# Altium PCB FTDI_Dynamixel_Board_2025.PcbDoc
Units mil, origin at the board's own origin, x right, y up, seen from the top; angles counter-clockwise.
Board outline 1535.43 x 1417.32 mil, 2 copper layers (Top Layer, Bottom Layer); 11 components, 8 nets, 61 pads, 39 vias.
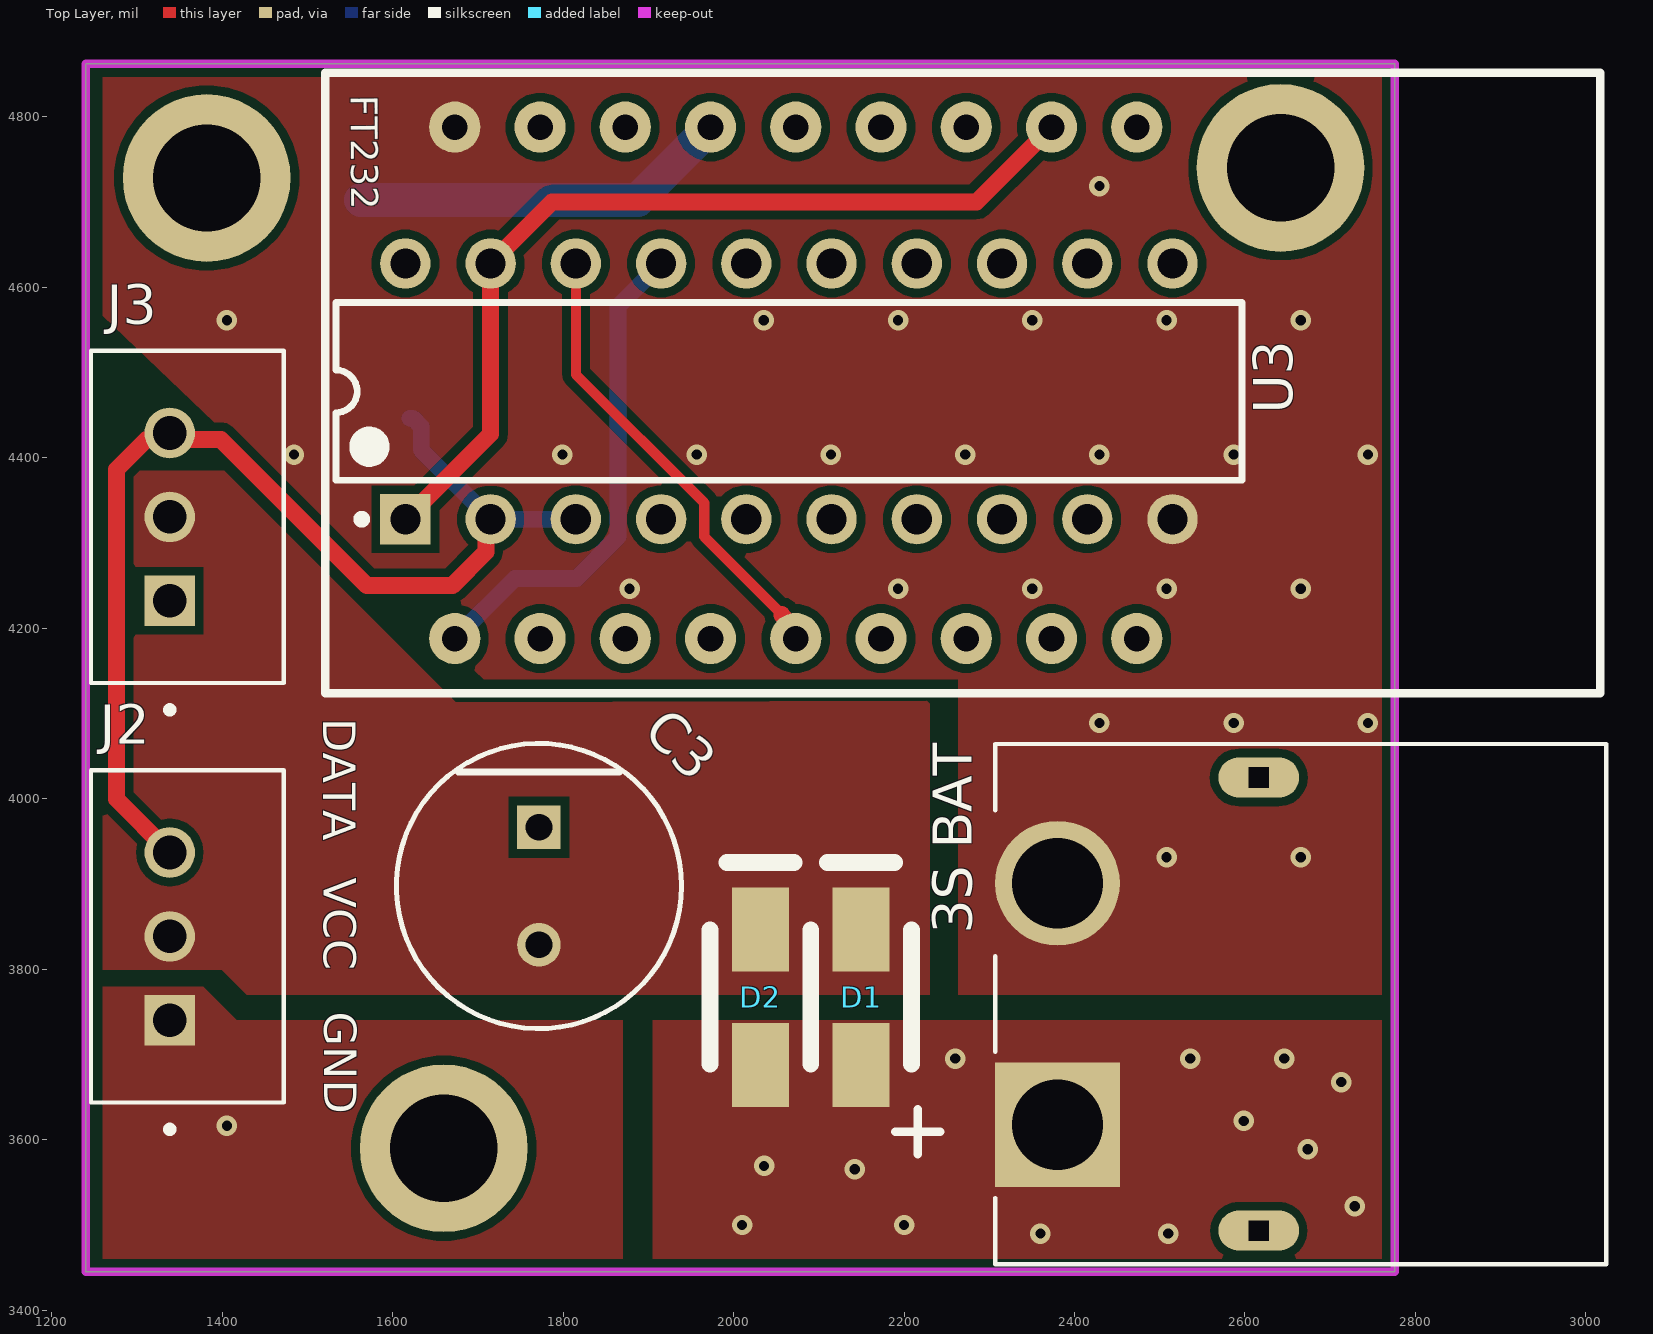
[diagram p0: Top Layer view]
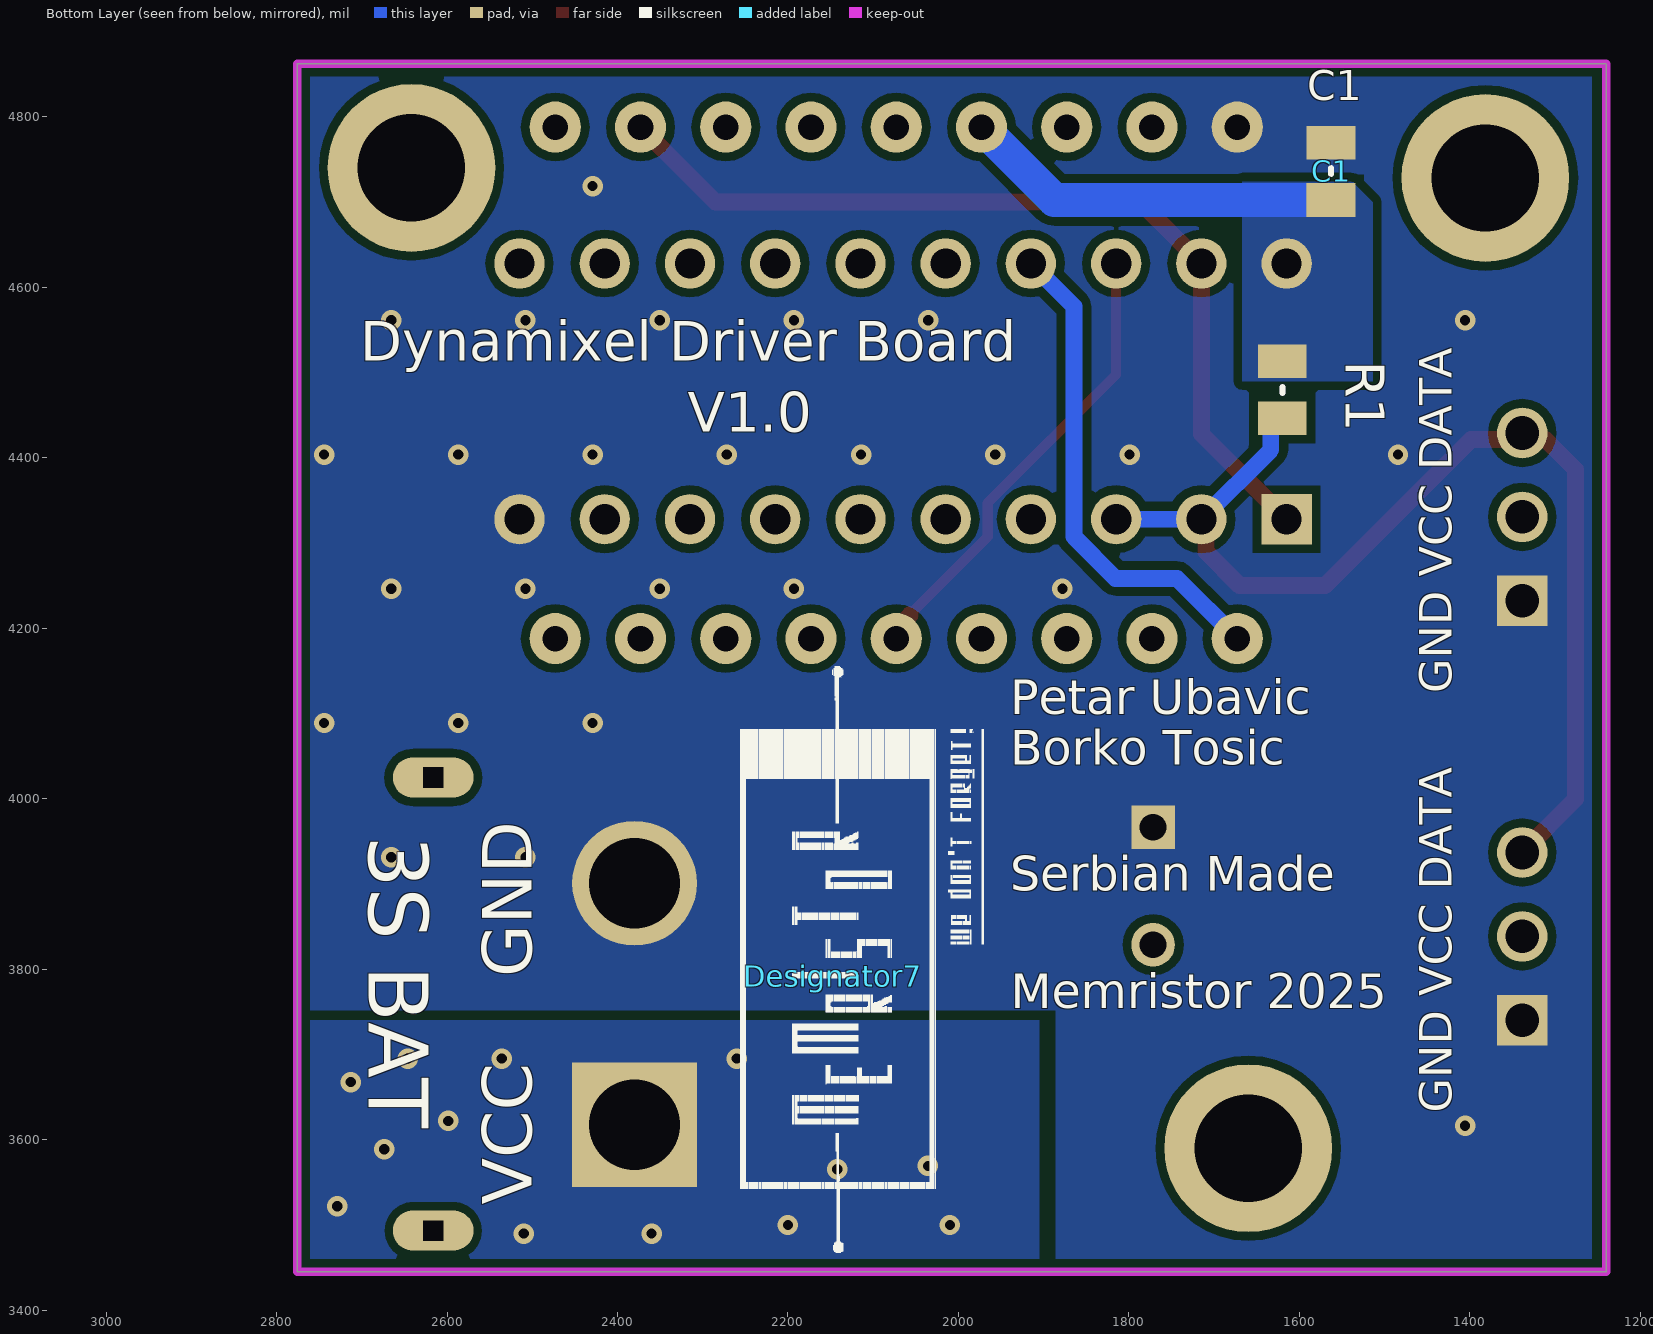
[diagram p1: Bottom Layer view, seen from below]
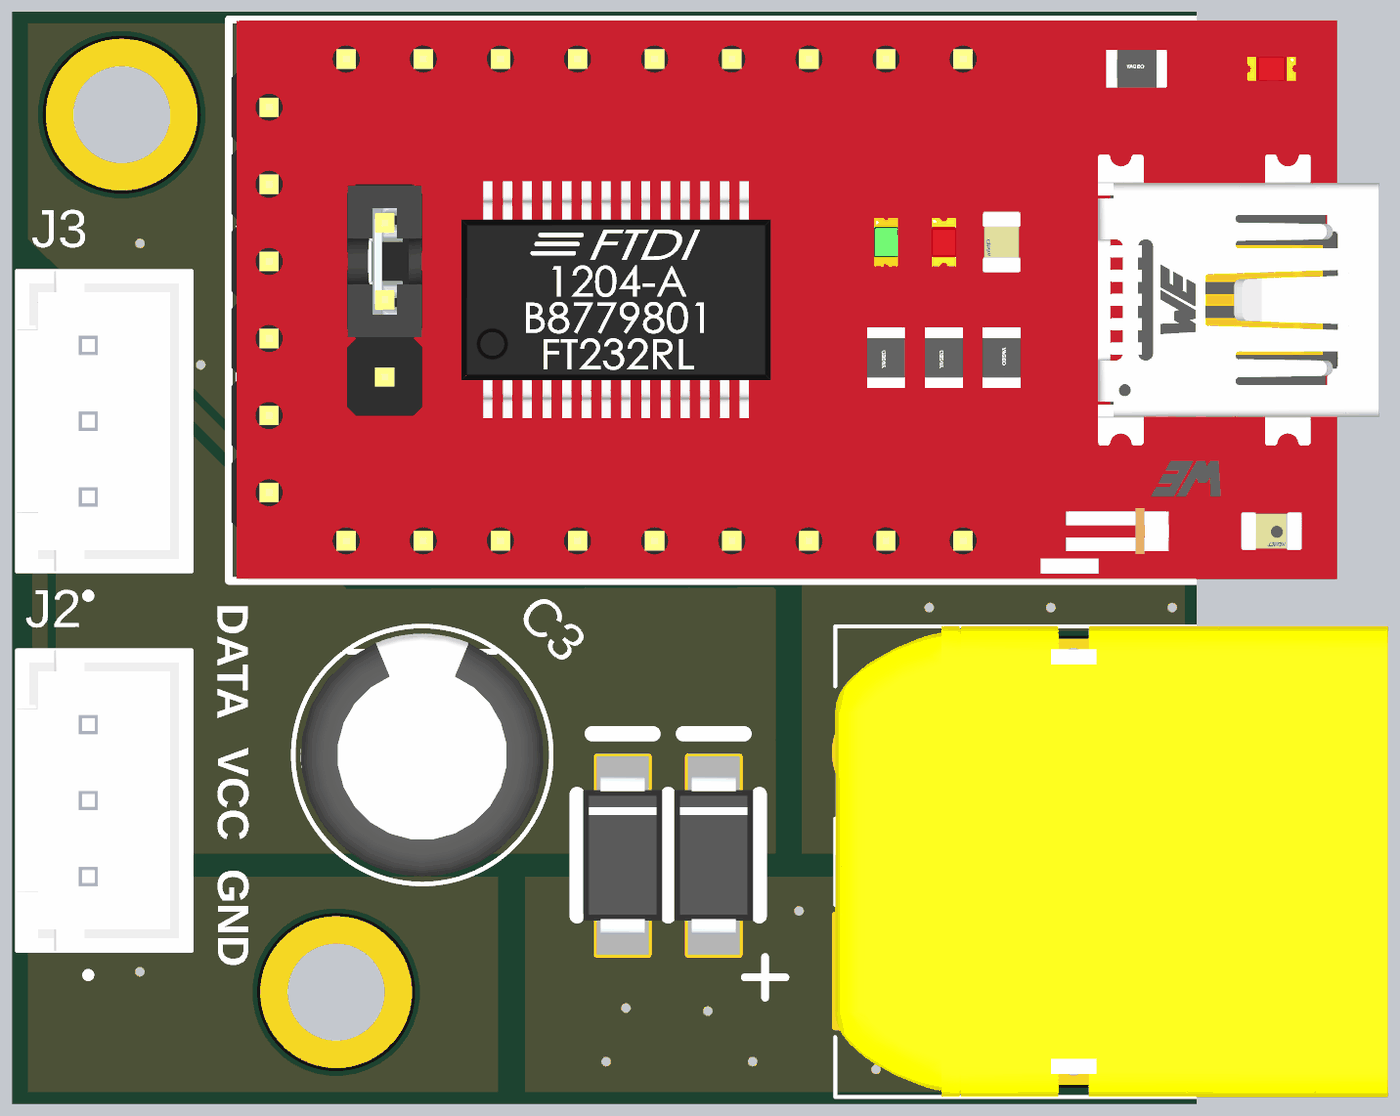
[diagram p2: 3D render of the assembled board from above, using the file's embedded part models]

## Layer stack, top to bottom
Top Solder: solder mask 0.4, Solder Resist, Dk 3.5
Top Layer: signal copper 1.4
Dielectric 1: dielectric 12.6, FR-4, Dk 4.8
Bottom Layer: signal copper 1.4
Bottom Solder: solder mask 0.4, Solder Resist, Dk 3.5

## Board outline
1240.16,3444.88 1240.16,4862.2 2775.59,4862.2 2775.59,3444.88

## Design rules (kind name [scope] priority, off if disabled: settings)
Clearance [All] p1: gap=10 ignorepadtopadclearanceinfootprint=FALSE
ComponentClearance [All] p1 off: gap=10 collisioncheckmode=3 verticalgap=10 showdistances=FALSE
HoleSize [All] p1: absolutevalues=TRUE maxlimit=300 minlimit=1 maxpercent=80.000 minpercent=20.000
MinimumSolderMaskSliver [All] p1: minsoldermaskwidth=6
PolygonConnect [All] p1: connectstyle=Direct reliefconductorwidth=30 reliefentries=4 polygonreliefangle="90 Angle" airgapwidth=10
RoutingVias [All] p1: holewidth=28 width=50 viastyle="Through Hole" minholewidth=28 minwidth=50 maxholewidth=28 maxwidth=50
SilkToSilkClearance [All] p1: silktosilkclearance=6
SilkToSolderMaskClearance [IsPad] p1: minsilkscreentomaskgap=6 clearancetoexposedcopper=TRUE
SolderMaskExpansion [All] p1: expansion=4 istentingtop=FALSE
Width [All] p1: maxlimit=50 minlimit=10 preferedwidth=20
25 further rules are at their usual default settings.

## Classes and differential pairs
component class FTDI_Dynamixel_Board_2025: "3S BAT" C1 C3 D1 D2 FT232 J2 J3 R1 U3

## Components (designator, comment, footprint, x,y, rotation, side; value= is the part's Value field where it differs from the comment)
"3S BAT" "XT60 90 Deg" XT60PW-M 2696.85,3759.84 r270 top (schematic designator J1)
C1 "100n" CAP_0805 1562,4737 r270 bottom
C3 "ECA-1CM471" FP-ECA-1CM471-MFG 1771.65,3897.64 r270 top
D1 "SS14" SMA 2149.61,3767.72 r90 top
D2 "SS14" SMA 2031.5,3767.72 r90 top
Designator7 "Comment" Memristor_LOGO_middle 2147.35,3792.37 r90 bottom
FT232 "ft232" FT232MODULL 2523,4788 r180 top (schematic designator U1)
J2 "B3B-XH-A(LF)(SN)" JST_B3B-XH-A(LF)(SN) 1359.25,3838.58 r270 top
J3 "B3B-XH-A(LF)(SN)" JST_B3B-XH-A(LF)(SN) 1359.25,4330.71 r270 top
R1 "4.7k" RESISTOR_0805_SMALLSILK 1620,4480 r90 bottom
U3 "SN74LS241N" N0020A 2065,4478 r90 top

## Footprints (in the part's own frame and the unit in brackets; to place one, negate y for a bottom-side part, rotate by r counter-clockwise, add the part's x,y. Pads: shape width x height; smd on the part's side, far side on the other; paste and mask are expansions set on the pad)
CAP_0805 [mm]
  rect 1x1.45 smd mask+0.102: 1(-0.824,-0.024) 2(0.876,-0.024)
  silkscreen extent -0.08,-0.03 0.1,-0.03, body extent -0.97,-0.76 1.23,0.69, height 0.6
FP-ECA-1CM471-MFG [mm]
  rect 1.3x1.3 hole 0.8 paste-2539.97 mask+0: 1(-1.75,0)
  round 1.3 hole 0.8 paste-2539.97 mask+0: 2(1.75,0)
  silkscreen extent -4.25,-4.25 4.25,4.25, body extent -4.35,-4.35 4.35,4.35, height 0.25
FT232MODULL [mil]
  round 60 hole 30: 1(50,0) 2(150,0) 3(250,0) 4(350,0) 5(450,0) 6(550,0) 7(650,0) 8(750,0) 9(850,0) 10(850,600) 11(750,600) 12(650,600) 13(550,600) 14(450,600) 15(350,600) 16(150,600) 16(250,600) 17(50,600)
  silkscreen extent -494,-64 1002,664, body extent -489,-62 999,662, height 671
JST_B3B-XH-A(LF)(SN) [mm]
  rect 1.508x1.508 hole 1: 1(2.5,-0.525)
  round 1.508 hole 1: 2(0,-0.525) 3(-2.5,-0.525)
  silkscreen extent -4.95,-2.88 5.85,2.88, body extent -4.95,-2.88 4.95,2.88, height 7
Memristor_LOGO_middle [mil]
  silkscreen extent -325,-177 363,108
N0020A [mm] "DIP, 20-Leads, Body 26.9x6.6mm, Pitch 2.54mm"
  rect 1.5x1.5 hole 0.9: 1(-3.81,11.43)
  round 1.5 hole 0.9: 2(-3.81,8.89) 3(-3.81,6.35) 4(-3.81,3.81) 5(-3.81,1.27) 6(-3.81,-1.27) 7(-3.81,-3.81) 8(-3.81,-6.35) 9(-3.81,-8.89) 10(-3.81,-11.43) 11(3.81,-11.43) 12(3.81,-8.89) 13(3.81,-6.35) 14(3.81,-3.81) 15(3.81,-1.27) 16(3.81,1.27) 17(3.81,3.81) 18(3.81,6.35) 19(3.81,8.89) 20(3.81,11.43)
  silkscreen extent -3.93,-13.5 2.65,13.5, body extent -3.95,-13.45 3.95,13.45, height 5.08
RESISTOR_0805_SMALLSILK [mm]
  rect 1x1.45 smd mask+0.102: 1(-0.849,0.002) 2(0.851,0.002)
  silkscreen extent -0.1,0 0.08,0, body extent -0.97,-0.63 1.03,0.63, height 0.6
SMA [mm]
  rect 2.5x1.7 smd: 1(-2.032,0) 2(2,0)
  silkscreen extent -2,-1.5 4,1, body extent -2.6,-1.3 2.6,1.3, height 2.4
XT60PW-M [mm] "XT60 90 Deg"
  round 3.716 hole 2.7: 1(-3.584,-8.048)
  rect 3.716x3.716 hole 2.7: 2(3.616,-8.048)
  oval 1.2x2.4 hole 0.6 square: S1(6.766,-2.048) S2(-6.734,-2.048)
  silkscreen extent -7.73,-12.88 7.77,8.3, body extent -7.73,-9.9 7.77,8.3, height 8.4

## Part data
"3S BAT": library part XT60PW-M
C1: library part C00079, "CAP 100nF ±10% 50V 0805 X7R", capacitance=100n
C3: library part CMP-05427-000068-1, "CAP ALUM 470UF 20% 16V RADIAL", capacitance=470uF, Case/Package=Radial, Leakage Current=3uA, Max Operating Temperature=85°C, Min Operating Temperature=-40°C, Package Quantity=200, Ripple Current=440mA, Tolerance=20%, Voltage=16V, Construction=RADIAL, Contact Plating=Tin, Diameter=8mm, Dissipation Factor=0.2%, Height=11.5mm, Height - Seated (Max)=0.492inch, Lead Diameter=0.6mm, Lead Pitch=3.5mm, Lead/Base Style=Straight, Length=11.5mm, Life (Hours)=2000Hour, Mount="Through Hole", Number of Pins=2, Packaging=Bulk, Polarity=Polar, Radiation Hardening=No, REACH SVHC="No SVHC", Series=M, Termination=Radial, Voltage Rating=16V, Voltage Rating (DC)=16V
D1 D2: library part SCH_DIODE
J2 J3: "Connector Header Through Hole 3 position 0.098 (2.50mm)", Package=None, Check_prices=https://www.snapeda.com/parts/B3B-XH-A(LF)(SN)/JST/view-part/?ref=eda, MF="JST Sales", MP=B3B-XH-A(LF)(SN), SnapEDA_Link=https://www.snapeda.com/parts/B3B-XH-A(LF)(SN)/JST/view-part/?ref=snap
R1: library part R000116, "RES  4k7 OHM 1% 1/8W 0805", resistance=4.7k
U3: library part CMP-0440-00144-3, "Octal Buffers And Line Drivers With 3-State Outputs, N0020A, TUBE", F @ Nom Voltage(Max)(Mhz)=35, Generic Part Number=SN74LS241, ICC @ Nom Voltage(Max)(mA)=0.046, Manufacturer="Texas Instruments", Operating Temperature Range(C)="0 to 70", Rating=Catalog, tpd @ Nom Voltage(Max)(ns)=18, Voltage(Nom)(V)=5, Bits(#)=8, Code_JEDEC=MS-001, DatasheetVersion=SDLS144C, Input Type=TTL, Output Type=TTL, PackageReference=N0020A, PackageVersion=http://www.ti.com/lit/ml/mpdi002c/mpdi002c.pdf, VCC(Max)(V)=5.25, VCC(Min)(V)=4.75

## Free pads (board coordinates)
  round 196.85 hole 125.98 mask+4: 9(1381.89,4728.35)
  round 196.85 hole 125.98: 9(1660,3590) 9(2641.73,4740.16)

## Via types
v1: diameter 24, hole 12, Top Layer to Bottom Layer, tented both sides, 39 vias

## Nets (pads, with @x,y where several pads share a name; then routed paths per layer and width w, separated by ;. In a path a pad name is that pad's centre, name@x,y a point inside that pad or via, vN(x,y) a via of type N, cw(c..) or ccw(c..) an arc to the next point about the centre after c; other vN are vias at no path point)
GND: "3S BAT.1" C1.1 C3.1 FT232.9 J2.1 J3.1 U3.10 | length 22.2
  Bottom Layer w10: J3.1@1337.6,4232.28 J3.1@1338.31,4233 ; 2409.36,3900.95 2409.36,3922.16
  other v1: 1405.59,3616.46 2507.95,3931.42 2665.43,3931.42 2429.21,4088.9 2586.69,4088.9 2744.17,4088.9 1878.03,4246.38 2192.99,4246.38 2350.47,4246.38 2507.95,4246.38 2665.43,4246.38 1484.33,4403.86 1799.29,4403.86 1956.77,4403.86 2114.25,4403.86 2271.73,4403.86 2429.21,4403.86 2586.69,4403.86 2744.17,4403.86 1405.59,4561.34 2035.51,4561.34 2192.99,4561.34 2350.47,4561.34 2507.95,4561.34 2665.43,4561.34 2429.21,4718.82
NetD1_1: "3S BAT.2" D1.1 D2.1
  other v1: 2360,3490 2510,3490 2010,3500 2200,3500 2728.68,3522.06 2142.07,3565.37 2035.77,3569.3 2673.56,3588.99 2598.42,3622.05 2712.93,3667.73 2260.18,3695.29 2535.77,3695.29 2646,3695.29
RXD: FT232.14 U3.18 | length 546.9
  Top Layer w11.81: U3.18 1815,4497.82 1965.63,4347.19 1965.63,4307.55 2056.68,4216.5
  Top Layer w19.68: 2056.68,4216.5 2056.68,4215.23 2073,4198.91 FT232.14
SERVO_DATA: J2.3 J3.3 R1.1 U3.2 U3.3 | length 1317.8
  Top Layer w19.68: J2.3 1276,3999.59 1276,4386.24 1311.3,4421.54 1330.99,4421.54 J3.3
  Top Layer w20: J3.3 1346.12,4421.6 1398.4,4421.6 1570,4250 1670,4250 1709.41,4289.41 1709.41,4322.41 U3.2
  Bottom Layer w19.68: R1.1 1623.71,4446.57 1633.56,4436.72 1633.56,4409.44 U3.2 U3.3
TXD: FT232.10 U3.17 | length 582.4
  Bottom Layer w20: FT232.10 1743.57,4258.57 1815.61,4258.57 1864.53,4307.48 1864.53,4577.53 U3.17
TXEN: FT232.2 U3.1 U3.19 | length 1088
  Top Layer w20: U3.1 1715,4428 U3.19 1787,4700 2285,4700 FT232.2
  Bottom Layer w20: U3.1 U3.1@1630.76,4343.76
"VCC 5V": C1.2 FT232.6 R1.2 U3.20 | length 459.7
  Bottom Layer w39.37: C1.2@1571.8,4702.5 C1.2 1887.5,4702.5 FT232.6 ; U3.20@1611.23,4631.77 U3.20
"VCC 12V": C3.2 D1.2 D2.2 J2.2 J3.2 | length 4.6
  Top Layer w19.68: J3.2@1334.36,4327.47 J3.2@1337.6,4330.71
pads on no net: "3S BAT.S1" "3S BAT.S2" FT232.1 FT232.3 FT232.4 FT232.5 FT232.7 FT232.8 FT232.11 FT232.12 FT232.13 FT232.15 FT232.16 FT232.17 U3.4 U3.5 U3.6 U3.7 U3.8 U3.9 U3.11 U3.12 U3.13 U3.14 U3.15 U3.16

## Polygon pours and split planes (outlines as drawn)
NetD1_1 on Bottom Layer "Bottom Layer-NetD1_1" (solid, pour order 32): 1905,3439 2775.59,3439 2775.59,3630.94 2775.59,3740.16 1905,3740.16
"VCC 5V" on Bottom Layer "VCC_5V_L02_P029" (solid, pour order 29): 1536,4722 1514,4700 1514,4490 1667,4490 1667,4724 1539,4724 1537,4726
GND on Bottom Layer "Bottom Layer-GND" (solid, pour order 31): 1726,4853.14 1735.06,4862.2 2775.59,4862.2 2775.59,3751.97 1886,3751.97 1886,3432 1257,3432 1257,4854.38
GND on Top Layer "NONET_L03_P-001" (solid, pour order 33): 1260,4846.46 2775.59,4846.46 2775.59,3770 2263.78,3770 2263.78,4140 1707.1,4140 1260,4566.78
GND on Top Layer "NONET_L03_P-001" (solid, pour order 35): 1260,3779.53 1377.95,3779.53 1417.32,3740.16 1870.08,3740.16 1870.08,3440 1260,3440
"VCC 12V" on Top Layer "Top Layer-VCC 12V" (solid, pour order 25): 1428.82,3770 1399.61,3799.21 1260,3799.21 1260,4385 1402.4,4385 1674.14,4113.26 2230,4115.04 2230,3770
NetD1_1 on Top Layer "Bottom Layer-NetD1_1" (solid, pour order 26): 1905,3440 2775.59,3440 2775.59,3630.94 2775.59,3740.16 1905,3740.16

## Keep-outs
Keep-Out Layer:
  the board outline again, w10

## Silkscreen, mask and mechanical layers (free items; w line width, h text height)
Top Overlay:
  text "DATA" at 1505.91,4094.49 h65 r270
  text "VCC" at 1506.63,3907.48 h65 r270
  text "GND" at 1506.69,3750 h65 r270
Bottom Overlay:
  text "C1" at 1590.55,4807.75 h60
  text "Dynamixel Driver Board" at 2701.69,4498.44 h80
  text "V1.0" at 2317.83,4415.41 h80
  text "GND VCC DATA" at 1408.26,4124.02 h65 r270
  text "Petar Ubavic" at 1938.98,4085.49 h70
  text "Borko Tosic" at 1938.98,4026.3 h70
  text "3S BAT" at 2714.93,3956.54 h120 r90
  text "Serbian Made" at 1939.11,3878.8 h70
  text "Memristor 2025" at 1938.91,3741 h70
  text "GND VCC DATA" at 1408.26,3631.89 h65 r270
  text "VCC    GND" at 2481.43,3523.71 h100 r270